# Altium PCB PCB1.PcbDoc
Units mil, origin at the board's own origin, x right, y up, seen from the top; angles counter-clockwise.
Board outline 4455.03 x 2680.03 mil, 2 copper layers (Top Layer, Bottom Layer); 34 components, 34 nets, 265 pads, 55 vias.
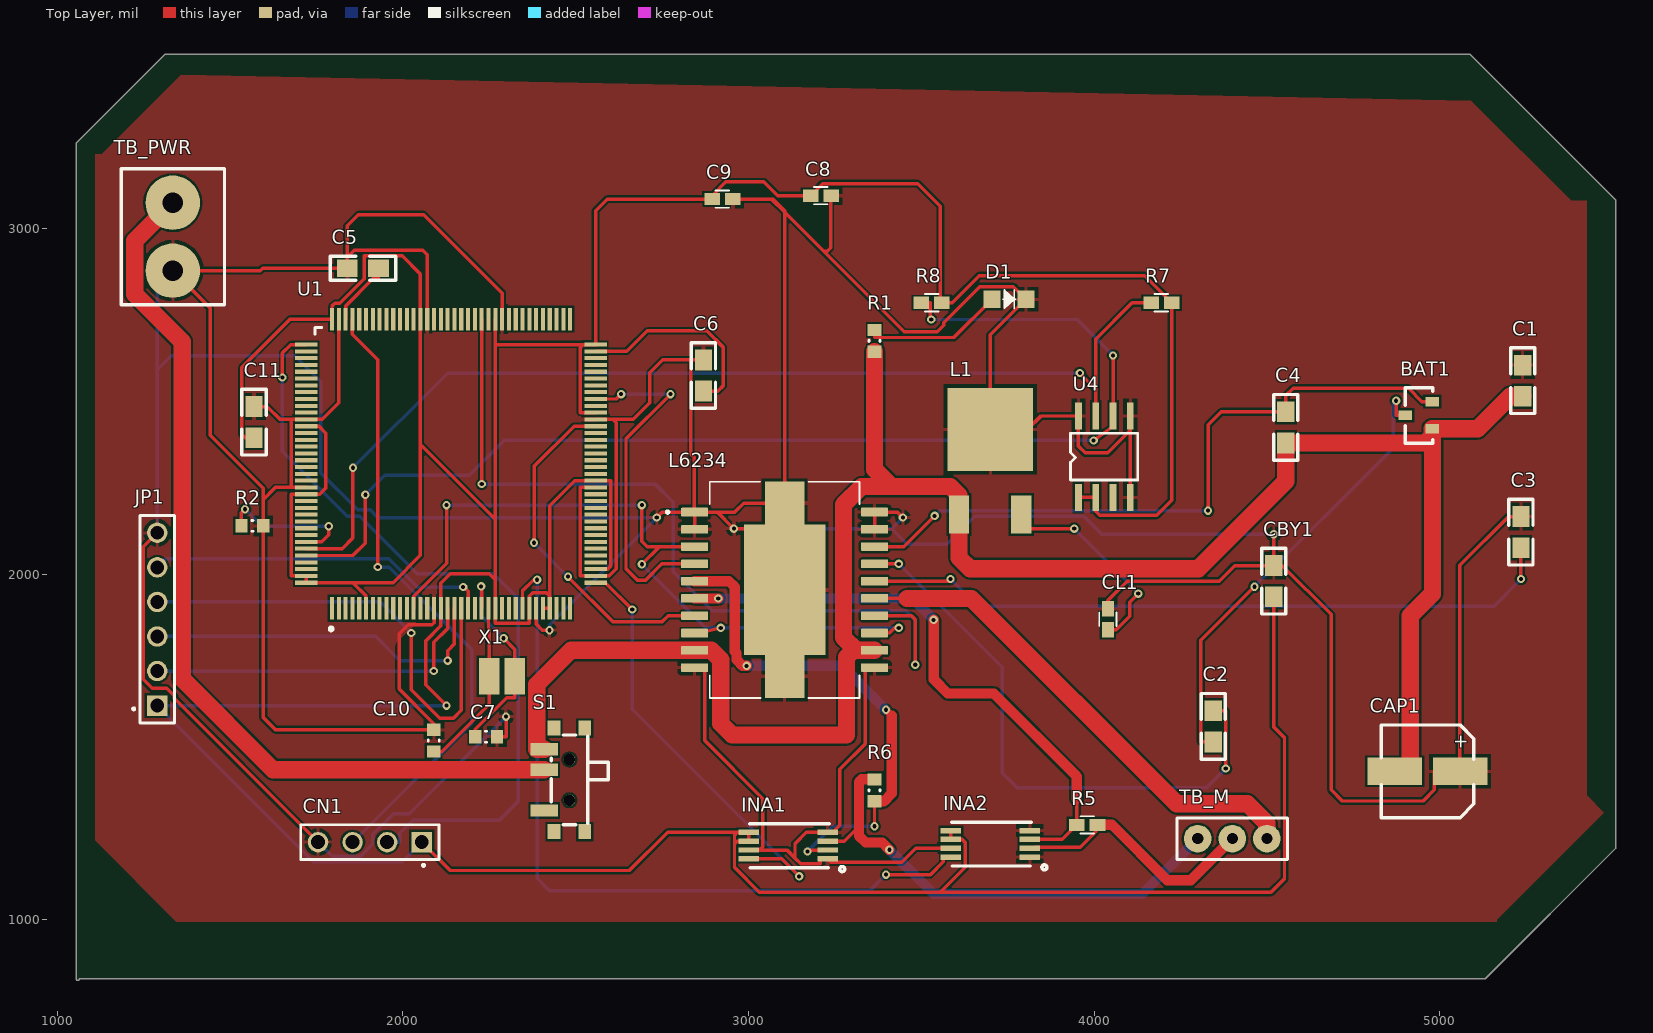
[diagram p0: Top Layer view]
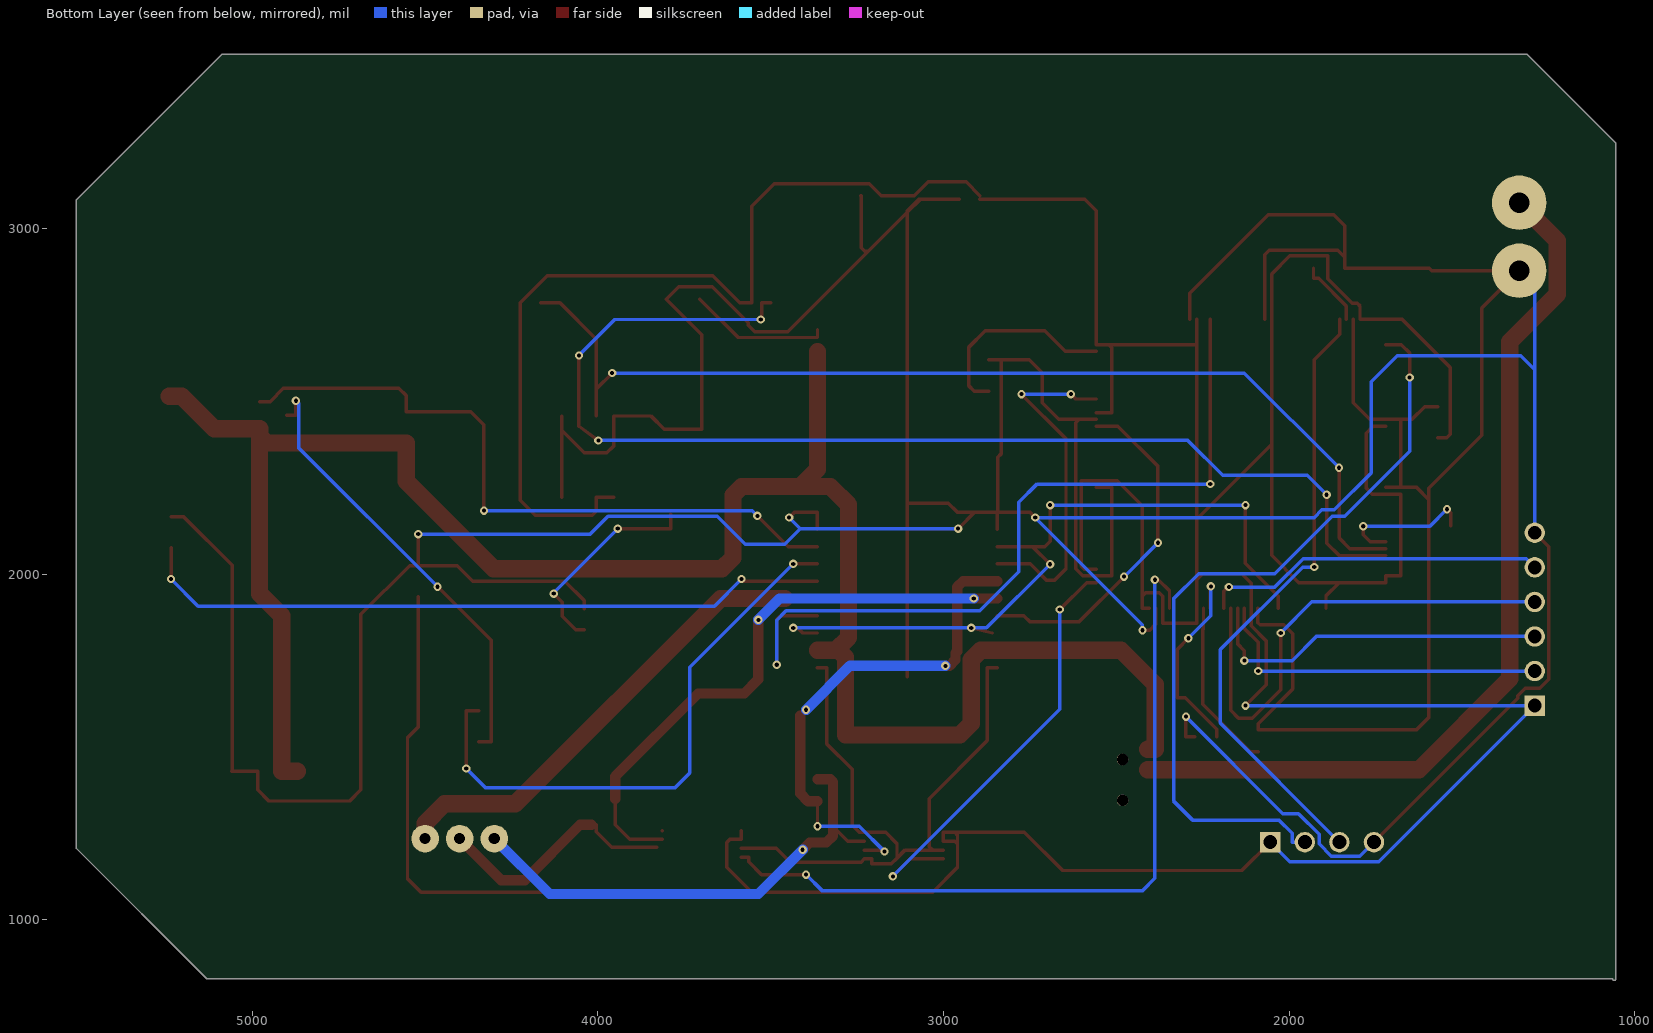
[diagram p1: Bottom Layer view, seen from below]

## Layer stack, top to bottom
Top Solder: solder mask 0.4, Solder Resist, Dk 3.5
Top Layer: signal copper 1.4
Dielectric 1: dielectric 12.6, FR-4, Dk 4.8
Bottom Layer: signal copper 1.4
Bottom Solder: solder mask 0.4, Solder Resist, Dk 3.5

## Board outline
1054.98,830 1054.98,3245 cw(c1060,3245) 1056.47,3248.56 1056.45,3248.55 1311.45,3503.55 1311.44,3503.53 cw(c1315,3500) 1315,3505.01 5085,3505.01 cw(c5085,3500) 5088.56,3503.53 5088.55,3503.55 5508.55,3083.55 5508.53,3083.56 cw(c5505,3080) 5510.02,3080 5510.02,1210 cw(c5505,1210) 5508.53,1206.44 5508.55,1206.45 5133.55,831.45 5133.56,831.47 cw(c5130,835) 5130,829.99 1065.02,829.99 cw(c1060,830)
cut-out: 5630,2880

## Design rules (kind name [scope] priority, off if disabled: settings)
Clearance [All] p1: gap=6 ignorepadtopadclearanceinfootprint=FALSE
MinimumSolderMaskSliver [All] p1: minsoldermaskwidth=1
PolygonConnect [All] p1: connectstyle=Direct reliefconductorwidth=10 reliefentries=4 polygonreliefangle="90 Angle" airgapwidth=10
RoutingVias [All] p1: holewidth=28 width=50 viastyle="Through Hole" minholewidth=28 minwidth=50 maxholewidth=28 maxwidth=50
SilkToSolderMaskClearance [IsPad] p1: minsilkscreentomaskgap=0 clearancetoexposedcopper=TRUE
SolderMaskExpansion [All] p1: expansion=4
Width [All] p1: maxlimit=50 minlimit=10 preferedwidth=10 minimp=50.000000 maximp=50.000000 favimp=50.000000
28 further rules are at their usual default settings.

## Components (designator, comment, footprint, x,y, rotation, side; value= is the part's Value field where it differs from the comment)
BAT1 "BAT54S" BAT54s 4900,2499.37 r0 top
C1 "100nF" C0805 5240,2515 r90 top
C2 "10nF" C0805 4345,1515 r90 top
C3 "1μF" C0805 5235,2076.73 r90 top
C4 "220nF" C0805 4555,2380 r90 top
C5 "1μF" C0805 1930,2885 r180 top
C6 "1μF" C0805 2870,2530 r90 top
C7 "4.3pF" 0603C 2241.5,1530 r0 top
C8 "100nF" R/C-0603 3180,3095 r0 top
C9 "1μF" R/C-0603 2895,3085 r0 top
C10 "4.3pF" 0603C 2090,1518.5 r90 top
C11 "100nF" C0805 1570,2395 r90 top
CAP1 "EEH-ZA1E101XP" EEH-ZA1E101XP 4830.63,1296.14 r0 top
CBY1 "0.1μF" C0805 4520,1935 r90 top
CL1 "0.1μF" R/C-0603 4040,1840 r90 top
CN1 "SWD" HDR_1x4_2R54_V_M 2055.2,1225 r180 top
D1 "LED" D0805+ 3705,2795.43 r0 top
INA1 "INA240A1" INA240 3115,1215 r90 top
INA2 "INA240A2" INA240 3700,1220 r90 top
JP1 "SPI1" HDR_1x6_2R54_V_M 1290,1620 r90 top
L1 "l78M08" L7805 3700,2435 r90 top
L6234 "L6234PD013TR" SOIC127P1420X360-21N 3105,1955 r0 top
R1 "2K" 0603R 3365,2675.43 r90 top
R2 "10K" 0603R 1565,2140 r0 top
R5 "10mOhm" R/C-0603 3950,1275 r0 top
R6 "10mOhm" 0603R 3365,1375 r90 top value=1K
R7 "4.7KOhm" R/C-0603 4165,2785.43 r0 top
R8 "4.7kOhm" R/C-0603 3500,2785.43 r0 top
S1 "" SW-SMD_G-SWITCH_MK-12C02-G015 2485,1405 r90 top
TB_M "TB002-500-03BE" 10.7MHZ 4500,1235 r180 top
TB_PWR "TB002-500-02BE" TB002-500-02BE 1335,2878.15 r90 top
U1 "MCU_LQFP144" LQFP144_0R5_SKT 2140,2320 r0 top
U4 "AS5600" "SOIC 8" 4030,2340 r90 top
X1 "NX3225GD-8M" OSC_2SM_3R2x2R5 2287.4,1705 r0 top

## Footprints (in the part's own frame and the unit in brackets; to place one, negate y for a bottom-side part, rotate by r counter-clockwise, add the part's x,y. Pads: shape width x height; smd on the part's side, far side on the other; paste and mask are expansions set on the pad)
10.7MHZ [mil]
  round 80 hole 32: 1(0,0) 2(200,0) 3(100,0)
  silkscreen extent -60,-60 260,60
0603C [mm] "Chip Capacitor, Body 1.6x0.8mm, Height 1.0mm, IPC Medium Density"
  rect 0.9x1 smd: 1(-0.8,0) 2(0.8,0)
  silkscreen extent -0.05,-0.4 0.05,0.4, body extent -0.87,-0.48 0.88,0.47, height 1
0603R [mm] "Chip Resistor, Body 1.6x0.8mm, IPC Medium Density"
  rect 0.9x1 smd: 1(-0.8,0) 2(0.8,0)
  silkscreen extent -0.05,-0.4 0.05,0.4, body extent -0.85,-0.47 0.85,0.47, height 0.6
BAT54s [mm]
  rect 1x0.7 smd: 1(2,-2) 2(2,0) 3(0,-1)
  silkscreen extent 0,-3.05 2.03,1.02, body extent -0.46,-2.48 2.46,0.44, height 1
C0805 [mil]
  rect 60x50 smd: 1(0,0) 2(90,0)
  silkscreen extent -50,-35 140,35
D0805+ [mil]
  rect 50x50 smd: A(0,0) K(98,0)
  silkscreen extent 31,-27 68,27
EEH-ZA1E101XP [mm]
  rect 4x2 smd: 1(1,3.4) 2(5.8,3.4)
  silkscreen extent 0,0 6.8,6.8, body extent -0.3,0.2 7,6.8, height 7.7
HDR_1x4_2R54_V_M [mm] "Male Header, Pitch 2.54mm, 4x1 Position, Mated Height 6mm, Tail Length 3mm"
  rect 1.5x1.5 hole 1.02: 1(0,0)
  round 1.5 hole 1.02: 2(2.54,0) 3(5.08,0) 4(7.62,0)
  silkscreen extent -1.27,-1.27 8.89,1.76, body extent -1.27,-1.27 8.89,1.27, height 9
HDR_1x6_2R54_V_M [mm] "Male Header, Pitch 2.54mm, 6x1 Position, Mated Height 6mm, Tail Length 3mm"
  rect 1.5x1.5 hole 1.02: 1(0,0)
  round 1.5 hole 1.02: 2(2.54,0) 3(5.08,0) 4(7.62,0) 5(10.16,0) 6(12.7,0)
  silkscreen extent -1.27,-1.27 13.97,1.79, body extent -1.27,-1.27 13.97,1.27, height 9
INA240 [mm]
  rect 0.4x1.5 smd mask+0.05: 1(-0.975,-2.9) 2(-0.325,-2.9) 3(0.325,-2.9) 4(0.975,-2.9) 5(0.975,2.9) 6(0.325,2.9) 7(-0.325,2.9) 8(-0.975,2.9)
  silkscreen extent -1.91,-4.16 1.6,2.82, body extent -1.5,-3.3 1.5,3.3, height 1.2
L7805 [mm] "l7805"
  rect 2.8x1.5 smd: 1(-6.65,2.3) 3(-6.65,-2.272)
  rect 6.1x6.3 smd: 2(-0.4,0)
  body extent -7.66,-3.3 2.06,3.1, height 2.3
LQFP144_0R5_SKT [mm] "32-bit MCU ARM-based Cortex-M3 20 X 20mm, 0.5mm Pitch, 1.6mm Max thickness"
  rect 0.3x1.65 smd: 1(-8.75,-10.625) 2(-8.25,-10.625) 3(-7.75,-10.625) 4(-7.25,-10.625) 5(-6.75,-10.625) 6(-6.25,-10.625) 7(-5.75,-10.625) 8(-5.25,-10.625) 9(-4.75,-10.625) 10(-4.25,-10.625) 11(-3.75,-10.625) 12(-3.25,-10.625) 13(-2.75,-10.625) 14(-2.25,-10.625) 15(-1.75,-10.625) 16(-1.25,-10.625) 17(-0.75,-10.625) 18(-0.25,-10.625) 19(0.25,-10.625) 20(0.75,-10.625) 21(1.25,-10.625) 22(1.75,-10.625) 23(2.25,-10.625) 24(2.75,-10.625) 25(3.25,-10.625) 26(3.75,-10.625) 27(4.25,-10.625) 28(4.75,-10.625) 29(5.25,-10.625) 30(5.75,-10.625) 31(6.25,-10.625) 32(6.75,-10.625) 33(7.25,-10.625) 34(7.75,-10.625) 35(8.25,-10.625) 36(8.75,-10.625) 73(8.75,10.625) 74(8.25,10.625) 75(7.75,10.625) 76(7.25,10.625) 77(6.75,10.625) 78(6.25,10.625) 79(5.75,10.625) 80(5.25,10.625) 81(4.75,10.625) 82(4.25,10.625) 83(3.75,10.625) 84(3.25,10.625) 85(2.75,10.625) 86(2.25,10.625) 87(1.75,10.625) 88(1.25,10.625) 89(0.75,10.625) 90(0.25,10.625) 91(-0.25,10.625) 92(-0.75,10.625) 93(-1.25,10.625) 94(-1.75,10.625) 95(-2.25,10.625) 96(-2.75,10.625) 97(-3.25,10.625) 98(-3.75,10.625) 99(-4.25,10.625) 100(-4.75,10.625) 101(-5.25,10.625) 102(-5.75,10.625) 103(-6.25,10.625) 104(-6.75,10.625) 105(-7.25,10.625) 106(-7.75,10.625) 107(-8.25,10.625) 108(-8.75,10.625)
  rect 1.65x0.3 smd: 37(10.625,-8.75) 38(10.625,-8.25) 39(10.625,-7.75) 40(10.625,-7.25) 41(10.625,-6.75) 42(10.625,-6.25) 43(10.625,-5.75) 44(10.625,-5.25) 45(10.625,-4.75) 46(10.625,-4.25) 47(10.625,-3.75) 48(10.625,-3.25) 49(10.625,-2.75) 50(10.625,-2.25) 51(10.625,-1.75) 52(10.625,-1.25) 53(10.625,-0.75) 54(10.625,-0.25) 55(10.625,0.25) 56(10.625,0.75) 57(10.625,1.25) 58(10.625,1.75) 59(10.625,2.25) 60(10.625,2.75) 61(10.625,3.25) 62(10.625,3.75) 63(10.625,4.25) 64(10.625,4.75) 65(10.625,5.25) 66(10.625,5.75) 67(10.625,6.25) 68(10.625,6.75) 69(10.625,7.25) 70(10.625,7.75) 71(10.625,8.25) 72(10.625,8.75) 109(-10.625,8.75) 110(-10.625,8.25) 111(-10.625,7.75) 112(-10.625,7.25) 113(-10.625,6.75) 114(-10.625,6.25) 115(-10.625,5.75) 116(-10.625,5.25) 117(-10.625,4.75) 118(-10.625,4.25) 119(-10.625,3.75) 120(-10.625,3.25) 121(-10.625,2.75) 122(-10.625,2.25) 123(-10.625,1.75) 124(-10.625,1.25) 125(-10.625,0.75) 126(-10.625,0.25) 127(-10.625,-0.25) 128(-10.625,-0.75) 129(-10.625,-1.25) 130(-10.625,-1.75) 131(-10.625,-2.25) 132(-10.625,-2.75) 133(-10.625,-3.25) 134(-10.625,-3.75) 135(-10.625,-4.25) 136(-10.625,-4.75) 137(-10.625,-5.25) 138(-10.625,-5.75) 139(-10.625,-6.25) 140(-10.625,-6.75) 141(-10.625,-7.25) 142(-10.625,-7.75) 143(-10.625,-8.25) 144(-10.625,-8.75)
  silkscreen extent -10,-12.27 -8.69,10
OSC_2SM_3R2x2R5 [mm] "Crystal 8M Hz 3.2x2.5mm SMD"
  rect 1.5x2.7 smd: 1(-0.95,0) 2(0.95,0)
  body extent -1.6,-1.25 1.6,1.25, height 1
R/C-0603 [mil]
  rect 45x35 smd: 1(0,0) 2(60,0)
  silkscreen extent 10,-25 50,25
SOIC127P1420X360-21N [mm]
  rrect16% 1.99x0.63 smd: 1(-6.61,5.715) 2(-6.61,4.445) 3(-6.61,3.175) 4(-6.61,1.905) 5(-6.61,0.635) 6(-6.61,-0.635) 7(-6.61,-1.905) 8(-6.61,-3.175) 9(-6.61,-4.445) 10(-6.61,-5.715) 11(6.61,-5.715) 12(6.61,-4.445) 13(6.61,-3.175) 14(6.61,-1.905) 15(6.61,-0.635) 16(6.61,0.635) 17(6.61,1.905) 18(6.61,3.175) 19(6.61,4.445) 20(6.61,5.715)
  rect 6x9.6 smd paste-6: 21(0,0)
  rect 2.9x3.15 smd paste-3: 22(0,6.375) 23(0,-6.375)
  silkscreen extent -8.7,-7.95 5.5,7.95
"SOIC 8" [mm]
  rect 2x0.5 smd: 1(-2.993,1.905) 2(-2.993,0.635) 3(-2.993,-0.635) 4(-2.993,-1.905) 5(2.993,-1.905) 6(2.993,-0.635) 7(2.993,0.635) 8(2.993,1.905)
  silkscreen extent -1.71,-2.45 1.72,2.48
SW-SMD_G-SWITCH_MK-12C02-G015 [mm]
  rect 0.9x2 smd: 1(-2.25,1.912) 2(0.75,1.912) 3(2.25,1.912)
  rect 1.1x0.93 smd: 4(3.8,1.2) 5(3.8,-1.07) 6(-3.8,-1.07) 7(-3.8,1.2)
  round 0.85 hole 0.85 unplated: ""(-1.5,0.065) ""(1.5,0.065)
  silkscreen extent -3.3,-2.78 3.3,1.42
TB002-500-02BE [mm] "TB002-500-02BE"
  round 4 hole 1.5: 1(0,0) 2(5,0)
  silkscreen extent -2.5,-3.8 7.5,3.8, body extent -2.5,-4.4 7.5,4.6, height 13.55

## Part data
BAT1: Supplier Part Number 1=512-BAT54S, Supplier 1=Mouser
C1 C2 C3 C4 C5 C6 C11 CBY1: library part CAP_1
C7 C8 C9 C10 CL1: library part CAP, "Capacitor"
CAP1: Supplier Part Number 1=667-EEH-ZA1E101XP, Supplier 1=Mouser
CN1: library part "Header 4", "Header, 4-Pin, Single row", Publisher="Altium Limited", Revision="17-Jul-2002: Re-released for DXP Platform."
INA1 INA2: library part INA240, Supplier Part Number 1=595-INA240A2PWR, Supplier 1=Mouser
JP1: library part "HEADER 6"
L6234: "Motor Driver BiCDMOS Parallel PowerSO-20", Package="SO-20 STMicroelectronics", Digi-Key_Part_Number=497-5352-1-ND, Digi-Key_Purchase_URL=https://www.digikey.com/product-detail/en/stmicroelectronics/L6234PD013TR/497-5352-1-ND/1154483?utm_source=snapeda&utm_medium=aggregator&utm_campaign=symbol, MF=STMicroelectronics, MP=L6234PD013TR, SnapEDA_Link=https://www.snapeda.com/parts/L6234PD013TR/STMicroelectronics/view-part/75337/?ref=snap
R1 R2: library part RES1
R5 R7 R8: library part RES2
R6: library part Res1, "Resistor", Ordered by=Subcon, Published=8-Jun-2000, Publisher="Altium Limited", Revision="July-2002: Re-released for DXP Platform."
S1: library part MK-12C02-G015
TB_M: Supplier Part Number 1=490-TB002-500-03BE, Supplier 1=Mouser
TB_PWR: Supplier Part Number 1=490-TB002-500-02BE, Supplier 1=Mouser
X1: library part XTAL, "Crystal Oscillator", LatestRevisionDate=17-Jul-2002, LatestRevisionNote="Re-released for DXP Platform.", PackageReference=R38, Published=8-Jun-2000, Publisher="Altium Limited"

## Via types
v1: diameter 24, hole 12, Top Layer to Bottom Layer, 55 vias

## Nets (pads, with @x,y where several pads share a name; then routed paths per layer and width w, separated by ;. In a path a pad name is that pad's centre, name@x,y a point inside that pad or via, vN(x,y) a via of type N, cw(c..) or ccw(c..) an arc to the next point about the centre after c; other vN are vias at no path point)
+3.3: C8.1 C9.1 C11.1 CBY1.1 CN1.1 INA1.5 INA1.6 INA2.5 INA2.6 JP1.1 R7.2 R8.2 U1.6 U1.17 U1.25 U1.30 U1.32 U1.33 U1.39 U1.52 U1.62 U1.72 U1.84 U1.95 U1.108 U1.121 U1.131 U1.143 U1.144 U4.1 U4.2 | length 15332.8
  Top Layer w10: C11.1 1544,2395 1534,2405 1534,2598 1674.31,2738.31 U1.108 1795.51,2776 1803.51,2784 1818,2784 1889,2855 1889,2921 1999,2921 2051.42,2868.58 U1.95 2051.42,2375.58 ; U1.121 1758,2428.27 1778,2408.27 1778,2249.42 1760,2231.42 U1.131 1678,2231.42 1678,1995.2 U1.143 U1.144 1856,1975.51 ; U1.6 1893.94,1937.57 1856,1975.51 ; CN1.1 2137.2,1143 2656,1143 2766.39,1253.39 2968,1253.39 ; v1(2127,1620) 2067,1680 2067,1806.99 2110.47,1850.46 U1.17 2110.47,1974.47 2138,2002 2249.95,2002 2267.95,1984 ; U1.84 2267.95,2665 ; U1.32 U1.33 2425.43,1936.57 ; U1.39 2592.88,2014.88 2602,2024 2602,2270.79 U1.52 2498,2270.79 2425.43,2198.22 2425.43,1936.57 ; U1.62 2514,2467.64 2514,2656 2522.49,2664.49 ; C9.1 2592,3085 2558.31,3051.31 U1.72 2522.49,2664.49 ; C9.1@2895,3095 2935,3135 3045,3135 3085,3095 C8.1 3215,3130 3490,3130 3555,3065 3555,2785.43 R8.2 3589.43,2785.43 3668,2864 4146.43,2864 R7.2 4225,2214 4182,2171 4016,2171 4005,2182 U4.2 U4.1 ; INA2.5 INA2.6 3618.2,1232.8 3627,1224 3627,1152 3555,1080 ; CBY1.1 4520,1558 4551,1527 4551,1119 4512,1080 3555,1080 ; 1856,1975.51 1972.51,1975.51 2051.42,2054.42 2051.42,2375.58 ; 2051.42,2375.58 2267.95,2159.05 ; 2267.95,1984 2267.95,2159.05 ; 2267.95,1984 U1.25 2267.95,1858 2366.38,1858 U1.30 2366.38,1936.38 2376,1946 2416,1946 2425.43,1936.57 ; 2267.95,2159.05 2267.95,2665 ; 2267.95,2665 2268.46,2664.49 2522.49,2664.49 ; 2960,1219.8 2960,1245.39 2968,1253.39 ; 2960,1219.8 2960,1152 3032,1080 3555,1080 ; 2960,1219.8 2968,1227.8 INA1.6 INA1.5 2968,1253.39
  Bottom Layer w10: CN1.1 1998.67,1168.47 1741.53,1168.47 JP1.1 v1(2127,1620)
GND: C1.2 C3.2 C5.2 C6.2 C7.2 C8.2 C9.2 C10.2 C11.2 CAP1.2 CBY1.2 CL1.2 CN1.4 D1.K INA1.1 INA1.4 INA1.7 INA2.1 INA2.4 INA2.7 JP1.6 L1.2 L6234.1 L6234.2 L6234.10 L6234.11 L6234.19 L6234.20 L6234.21 L6234.22 L6234.23 R2.2 TB_PWR.1 U1.16 U1.31 U1.38 U1.51 U1.61 U1.83 U1.94 U1.107 U1.120 U1.130 U4.4 U4.5 U4.8 | length 22725
  Top Layer w10: JP1.6 1249,2079 1249,1696 1275,1670 1317,1670 1339,1648 1339,1641.2 CN1.4 ; C11.2 1607.95,2485 1645,2447.95 1678,2447.95 ; U1.130 1678,2251.1 ; U1.107 1815.2,2496 1767.15,2447.95 U1.120 1678,2447.95 ; U1.94 2071.1,2923.9 2058,2937 1860,2937 1840,2917 ; U1.16 2090.79,1859.78 2084.63,1853.62 2016.09,1853.62 1990,1827.53 1990,1668 2090,1568 C10.2 1632,1550 1596.5,1585.5 R2.2 1596.5,2215.6 ; C7.2 2299,1530 v1(2299,1588) ; U1.83 2287.64,2813 2060.64,3040 1872,3040 1840,3008 1840,2917 ; U1.31 2386.06,1856 2404.06,1838 v1(2425,1838) ; U1.51 2514,2251.1 2514,1995.2 U1.38 2597.2,1995.2 2618,2016 2618,2437.95 2608,2447.95 ; U1.61 2608,2447.95 ; v1(2735,2164) 2751,2180 L6234.1@2844,2180 ; L6234.10 2874,1730 2874,1519 3042,1351 3042,1212.2 3032,1202.2 ; L6234.2 L6234.1 ; C6.2 2834,2620 ; C9.2 3067,3085 ; INA1.7 3032,1202.2 ; L6234.23 L6234.21 L6234.21@3105,2132 ; C8.2 3238,3095 3238,2944 3228,2934 3218,2934 ; L6234.11 3338,1730 3338,1509 3265,1436 3265,1274.39 3244,1253.39 INA1.4 3168,1253.39 3135,1220.39 3135,1179 ; L6234.19 L6234.20 3431,2180 v1(3447,2164) ; INA2.7 3484.2,1207.2 3444,1167 3238.79,1167 INA1.1 3207.65,1176.61 3207.65,1162 3152,1162 3135,1179 ; INA2.4@3814,1258.39 INA2.4 ; CL1.2 4040,1924 4096,1980 4362,1980 4407,2025 CBY1.2 ; U4.4 4105,2416 ; U4.5 4105,2416 ; v1(4520,2116) CBY1.2 ; CAP1.2 CAP1.2@5058,1430 ; C3.2 5199,2166.73 5058,2025.73 CAP1.2@5058,1430 ; 1596.5,2215.6 1596.5,2249 1443,2402.5 1443,2770.15 TB_PWR.1 1588,2878.15 1594.85,2885 C5.2 1840,2917 ; 1596.5,2215.6 1632,2251.1 1678,2251.1 ; 1678,2251.1 1678,2447.95 ; 2608,2447.95 2666.95,2447.95 2715,2496 2715,2583 2752,2620 2834,2620 ; 2834,2620 2834,2348 2844,2338 L6234.1@2844,2180 ; L6234.1@2844,2180 L6234.1 ; L6234.1 2910,2180 ; 2910,2180 2961,2180 2986.98,2205.98 L6234.22 ; 2910,2180 v1(2958,2132) L6234.21@3105,2132 ; 3032,1202.2 3111.8,1202.2 3135,1179 ; 3067,3085 3105,3047 ; 3067,3085 3072,3085 3105,3052 3105,3047 ; L6234.21@3105,2132 L6234.22 ; L6234.22 3105,3047 ; 3105,3047 3218,2934 ; 3218,2934 3451,2701 3546,2701 3565,2720 3565,2728 3669,2832 3766.43,2832 D1.K 3700,2692.43 L1.2 3808,2419.25 3846.58,2457.83 U4.8 3955,2370.55 3974.55,2351 4040,2351 4105,2416 ; CBY1.2 4545,2025 4686,1884 4686,1376 4718,1344 4952,1344 4984,1376 4984,1430 CAP1.2@5058,1430
  Bottom Layer w10: JP1.6 1290,2592 ; TB_PWR.1 1290,2833.15 1290,2592 ; CN1.4 1795.73,1184.47 1878.47,1184.47 1914,1220 1914,1248 1973.56,1307.56 2018.56,1307.56 v1(2299,1588) ; v1(2425,1838) 2425,1854 v1(2735,2164) 1928,2164 1905.72,2186.28 1869.64,2186.28 1763,2292.92 1763,2557 1688,2632 1330,2632 1290,2592 ; v1(2958,2132) 3415,2132 ; v1(3447,2164) 3415,2132 ; v1(4520,2116) 4023,2116 3971,2168 3655,2168 3574.32,2087.32 3459.68,2087.32 3415,2132
NetBAT1_2: BAT1.2 C4.2 L6234.18 | length 1992
  Top Layer w10: L6234.18 3450,2080 v1(3539,2169) ; v1(4330,2184) 4330,2432 4368,2470 C4.2 4555,2517 4576,2538 4910,2538 4948.63,2499.37 BAT1.2
  Bottom Layer w10: v1(3539,2169) 3554,2184 v1(4330,2184)
NetBAT1_3: BAT1.3 C2.1 | length 1325
  Top Layer w10: C2.1 4309,1515 4309,1809 v1(4464,1964) ; v1(4874,2502) 4874,2460 BAT1.3
  Bottom Layer w10: v1(4464,1964) 4865,2365 4865,2493 v1(4874,2502)
NetC2_2: C2.2 L6234.17 | length 1688.8
  Top Layer w10: L6234.17 v1(3435,2030) ; C2.2 4381,1605 v1(4381,1438)
  Bottom Layer w10: v1(3435,2030) 3734,1731 3734,1425 3776,1383 4326,1383 v1(4381,1438)
NetC3_1: C3.1 L6234.16 | length 2027.6
  Top Layer w10: L6234.16 3579,1980 v1(3585,1986) ; v1(5235,1986) C3.1
  Bottom Layer w10: v1(3585,1986) 3663,1908 5157,1908 v1(5235,1986)
NetC5_1: C5.1 U1.106 | length 210.1
  Top Layer w10: U1.106 1834.88,2776 1914.88,2856 ; C5.1 1930,2856 ; 1914.88,2856 1930,2856 ; 1914.88,2856 1930,2856
NetC6_1: C6.1 U1.71 | length 588.7
  Top Layer w10: U1.71 2647.8,2644.8 2707,2704 2880,2704 2928,2656 2928,2546 2912,2530 C6.1
NetC7_1: C7.1 U1.23 X1.2 | length 601.2
  Top Layer w10: C7.1 2210,1552 2300.61,1642.61 2324.8,1642.61 X1.2 2324.8,1782.2 v1(2292,1815) ; v1(2227,1965) 2228.58,1963.42 U1.23
  Bottom Layer w10: v1(2227,1965) 2227,1880 v1(2292,1815)
NetC10_1: C10.1 U1.24 X1.1 | length 495.2
  Top Layer w10: C10.1 2113.01,1487.01 2250,1624 X1.1 2250,1841.27 2248.27,1843 U1.24
NetCL1_1: CL1.1 L1.3 | length 767.4
  Top Layer w10: L1.3 L1.3@3789.45,2132 ; CL1.1 4064,1840 4103,1879 4103,1919 v1(4128,1944) ; L1.3@3789.45,2132 v1(3943,2132) L1.3@3789.45,2132
  Bottom Layer w10: v1(3943,2132) 4128,1947 v1(4128,1944)
NetCN1_2: CN1.2 U1.109 | length 2253.2
  Top Layer w10: v1(1652,2569) 1652,2640 1676.49,2664.49 U1.109
  Bottom Layer w10: v1(1652,2569) 1652,2356.25 1840,2168.25 1875.75,2168.25 2042,2002 2262.55,2002 2335,1929.55 2335,1344 2280,1289 2030,1289 1992,1251 1992,1225 CN1.2
NetCN1_3: CN1.3 U1.105 | length 1818.9
  Top Layer w10: U1.105 1854.57,2694 1928,2620.57 v1(1928,2020.83)
  Bottom Layer w10: CN1.3 2200,1569.8 2200,1782.37 1961.54,2020.83 v1(1928,2020.83)
NetD1_A: D1.A R1.2 | length 637.3
  Top Layer w10: R1.2 3365,2684.93 ; D1.A 3594.5,2684.93 ; 3365,2684.93 3594.5,2684.93 ; 3365,2684.93 3594.5,2684.93
NetINA1_2: INA1.2 L6234.5 R6.1 | length 1493
  Top Layer w10: v1(3171,1198) 3175.2,1202.2 INA1.2 ; v1(3365,1271) R6.1
  Top Layer w20: 2960,1964 2961,1963 ; v1(3398,1608) 3415,1591
  Top Layer w30: L6234.5 2944,1980 2960,1964 ; 2961,1963 2961,1776.98 2965.89,1772.09 2965.89,1752.11 2983,1735 v1(2995,1735) ; R6.1 3392.5,1343.5 3415,1366 3415,1591
  Bottom Layer w10: v1(3171,1198) 3244,1271 v1(3365,1271)
  Bottom Layer w30: v1(2995,1735) 3271,1735 v1(3398,1608)
NetINA1_3: INA1.3 R6.2 TB_M.2 | length 1740.7
  Top Layer w10: INA1.3 3278,1227.8 ; R6.2 3344,1406.5 3328,1390.5 3328,1277.8 ; 3278,1227.8 3328,1277.8 ; 3278,1227.8 3328,1277.8
  Top Layer w20: 3320,1244 3320,1282 ; 3328,1406.5 R6.2
  Top Layer w30: R6.2 3328,1406.5 3320,1398.5 3320,1345.95 3320,1282 3320,1244 3340,1224 3387,1224 v1(3408,1203)
  Bottom Layer w30: v1(3408,1203) 3536,1075 4140,1075 TB_M.2
NetINA1_8: INA1.8 U1.37 | length 1277
  Top Layer w10: U1.37 2586.49,1975.51 v1(2664,1898) ; INA1.8 3096.39,1176.61 v1(3147,1126)
  Bottom Layer w10: v1(2664,1898) 2664,1609 v1(3147,1126)
NetINA2_2: INA2.2 R5.2 TB_M.3 | length 724.6
  Top Layer w10: INA2.2@3830,1210 3960,1210 4005,1255 4005,1275 R5.2 R5.2@4020,1275
  Top Layer w30: R5.2@4020,1275 4052,1275 4212,1115 4280,1115 TB_M.3
NetINA2_3: INA2.3 L6234.6 R5.1 | length 1712.6
  Top Layer w10: INA2.3 3907.8,1232.8 R5.1 3950,1350
  Top Layer w30: L6234.6 v1(2913,1930) ; v1(3536,1868) 3536,1696 3577,1655 3710,1655 3950,1415 3950,1350
  Bottom Layer w30: v1(2913,1930) 3474,1930 v1(3536,1868)
NetINA2_8: INA2.8 U1.29 | length 2242.8
  Top Layer w10: U1.29 2346.69,1952 2378.69,1984 v1(2389,1984) ; v1(3398,1131) 3527,1131 3564,1168 ; INA2.8 INA2.8@3564,1181.61 ; 3564,1168 INA2.8@3564,1181.61 ; 3564,1168 INA2.8@3564,1181.61
  Bottom Layer w10: v1(2389,1984) 2389,1120 2424,1085 3352,1085 v1(3398,1131)
NetJP1_2: JP1.2 U1.18 | length 998.3
  Top Layer w10: v1(2090,1720) 2090,1802.89 2130.16,1843.05 U1.18
  Bottom Layer w10: JP1.2 v1(2090,1720)
NetJP1_3: JP1.3 U1.19 | length 1028.9
  Top Layer w10: v1(2130,1750) 2130,1779 2149.84,1798.84 U1.19
  Bottom Layer w10: JP1.3 1921.54,1820 1991.54,1750 v1(2130,1750)
NetJP1_4: JP1.4 U1.20 | length 1419.5
  Top Layer w10: v1(2025,1830) 2025,1666 2107,1584 2147,1584 2170,1607 2170,1811.53 U1.20
  Bottom Layer w10: JP1.4 1935,1920 v1(2025,1830)
NetJP1_5: JP1.5 U1.21 | length 1000.5
  Top Layer w10: v1(2175,1963) 2175,1965 2189.21,1950.79 U1.21
  Bottom Layer w10: JP1.5 1315,2045 1960,2045 2042,1963 v1(2175,1963)
NetL6234_3: L6234.3 L6234.8 L6234.13 U1.13 | length 2195.3
  Top Layer w10: U1.13 2031.73,1936.73 2127,2032 v1(2127,2200) ; v1(2692,2029) 2743,2080 ; v1(2692,2200) 2692,2096 2708,2080 2743,2080 ; L6234.3 2743,2080 ; L6234.8@2860,1830 v1(2920,1845) ; L6234.13 3408,1830 3423,1845 v1(3435,1845)
  Bottom Layer w10: v1(2127,2200) v1(2692,2200) ; v1(2692,2029) 2876,1845 v1(3435,1845)
NetL6234_4: L6234.4 U1.64 | length 1013.7
  Top Layer w10: U1.64 2618.01,2507.01 v1(2632,2521) ; v1(2775,2521) 2646,2392 2646,2016 2680,1982 2702,1982 2750,2030 L6234.4
  Bottom Layer w10: v1(2632,2521) v1(2775,2521)
NetL6234_7: L6234.7 U1.60 | length 1014.7
  Top Layer w10: v1(2380,2091) 2380,2312.27 2496,2428.27 U1.60 ; v1(2478,1993) 2609,1862 2750,1862 2768,1880 L6234.7
  Bottom Layer w10: v1(2380,2091) v1(2478,1993)
NetL6234_14: L6234.14 U1.86 | length 2388
  Top Layer w10: v1(2228.58,2261) U1.86 ; L6234.14 3472,1880 3483,1869 v1(3483,1738)
  Bottom Layer w10: v1(2228.58,2261) 2730,2261 2783,2208 2783,2007 2896,1894 3456,1894 3483,1867 v1@3483,1745
NetL6234_15: L6234.15 TB_M.1 | length 1414.2
  Top Layer w10: L6234.15@3400,1930 3460,1930
  Top Layer w50: 3460,1930 3645,1930 4239,1336 4444,1336 4500,1280 TB_M.1
NetR2_1: R2.1 U1.138 | length 412.4
  Top Layer w10: R2.1 1533.5,2177.5 v1(1544,2188) ; U1.138 1765.62,2093.62 1786,2114 v1(1786,2139)
  Bottom Layer w10: v1(1544,2188) 1593,2139 v1(1786,2139)
NetR7_1: R7.1 U1.139 U4.7 | length 3057.8
  Top Layer w10: U1.139 1824.94,2073.94 1856,2105 v1(1856,2308) ; v1(3959,2582) 4005,2536 ; U4.7 4005,2536 ; R7.1 4110,2785.43 4005,2680.43 4005,2536
  Bottom Layer w10: v1(1856,2308) 2130,2582 v1(3959,2582)
NetR8_1: R8.1 U1.140 U4.6 | length 3461.6
  Top Layer w10: U1.140 1856,2054.25 1892,2090.25 v1(1892,2230) ; R8.1 3526,2785.43 ; v1(3529,2737) v1@3526,2740 ; v1(3999,2387) 4055,2428 U4.6 v1(4055,2633) ; v1@3526,2740 3526,2785.43 ; v1@3526,2740 3526,2785.43
  Bottom Layer w10: v1(1892,2230) 1948,2286 2193,2286 2294,2387 v1(3999,2387) ; v1(3529,2737) 3951,2737 v1(4055,2633)
NetS1_2: S1.2 TB_PWR.2 | length 2636.5
  Top Layer w50: TB_PWR.2 1225,2965 1225,2810 1362,2673 1362,1697.53 1625,1434.53 S1.2
VCC1: BAT1.1 C1.1 C4.1 CAP1.1 L1.1 L6234.9 L6234.12 R1.1 S1.3 | length 6055.5
  Top Layer w50: S1.3 2388,1493.58 2388,1681 2487,1780 L6234.9 2892.93,1780 2919.89,1753.04 2919.89,1568.11 2953,1535 3284,1535 3284,1760 3304,1780 3312,1780 ; R1.1 3365,2304 3415,2254 ; L6234.12 3312,1780 ; CAP1.1 4915,1430 4915,1880 4979,1944 BAT1.1@4979,2420.63 ; C1.1 5204.37,2515 5110,2420.63 BAT1.1@4979,2420.63 ; 3312,1780 3275,1817 3275,2201 3328,2254 3415,2254 ; 3415,2254 3584,2254 3609.45,2228.55 L1.1 3609.45,2048 3641.45,2016 4302,2016 4555,2269 C4.1 4960,2380 4978.74,2398.74 BAT1.1 BAT1.1@4979,2420.63
pads on no net: S1. S1.1 S1.4 S1.5 S1.6 S1.7 U1.1 U1.2 U1.3 U1.4 U1.5 U1.7 U1.8 U1.9 U1.10 U1.11 U1.12 U1.14 U1.15 U1.22 U1.26 U1.27 U1.28 U1.34 U1.35 U1.36 U1.40 U1.41 U1.42 U1.43 U1.44 U1.45 U1.46 U1.47 U1.48 U1.49 U1.50 U1.53 U1.54 U1.55 U1.56 U1.57 U1.58 U1.59 U1.63 U1.65 U1.66 U1.67 U1.68 U1.69 U1.70 U1.73 U1.74 U1.75 U1.76 U1.77 U1.78 U1.79 U1.80 U1.81 U1.82 U1.85 U1.87 U1.88 U1.89 U1.90 U1.91 U1.92 U1.93 U1.96 U1.97 U1.98 U1.99 U1.100 U1.101 U1.102 U1.103 U1.104 U1.110 U1.111 U1.112 U1.113 U1.114 U1.115 U1.116 U1.117 U1.118 U1.119 U1.122 U1.123 U1.124 U1.125 U1.126 U1.127 U1.128 U1.129 U1.132 U1.133 U1.134 U1.135 U1.136 U1.137 U1.141 U1.142 U4.3

## Polygon pours and split planes (outlines as drawn)
GND on Top Layer "Top Layer-GND" (solid, remove dead copper, pour order 6): 1360,3445 1130,3215 1110,3215 1110,1230 1345,995 5165,995 5165,1000 5475,1310 5425,1360 5425,3080 5380,3080 5090,3370

## Silkscreen, mask and mechanical layers (free items; w line width, h text height)
Mechanical 1:
  lines w10: 1060,830 1060,3245 1315,3500 5085,3500 5505,3080 5505,1210 5130,835 1065,835 1060,830

## Text inside footprints (layer, text, board x,y; h text height)
CAP1: Top Overlay "+" at 5078.66,1492.99 h40 r90